# EAGLE board Joystickv13 (EAGLE 7.2.0)
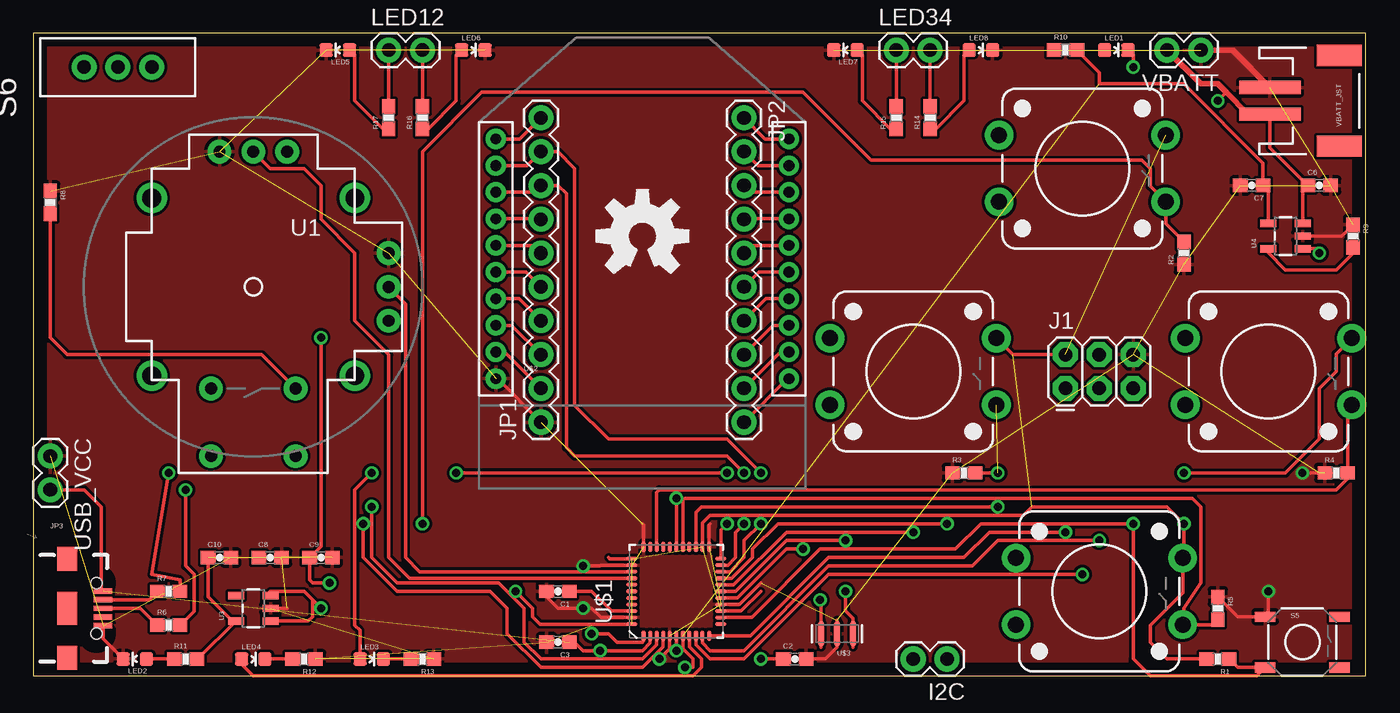
[diagram p0: board, top side]
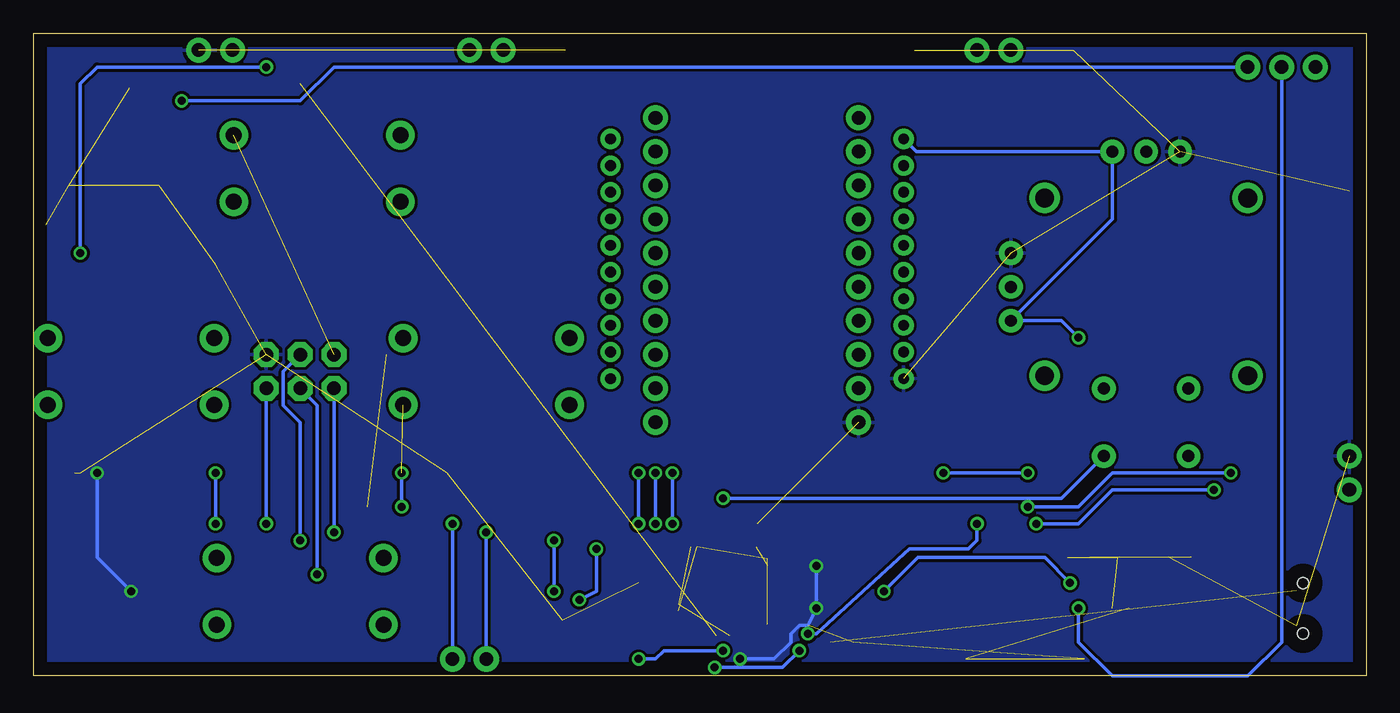
[diagram p1: board, bottom side, seen from below]

Size 100 x 48.25 mm. Coordinates in mm from the lower left corner, seen from the top.
Outline: 0,0 100,0 100,48.25 0,48.25 0,0
Copper layers (1*16): Top 0.035mm / dielectric 1.5mm / Bottom 0.035mm
Design rules "default": minimum track width 10mil, minimum drill 0.6mm, track to track 8mil, track to pad 8mil, pad to pad 8mil, via to via 8mil, smd to smd 8mil, copper to edge 40mil, drill to drill 8mil, minimum pad ring 10mil, minimum via ring 8mil, stop-mask expansion 4mil, vias tented up to drill 0mil, thermal gap 10mil

## Footprints (pad centres in the part's own frame; a part is rotated, then mirrored left to right if it is on the bottom)
0603-CAP = smd 1.1 x 1: 1 -0.85,0; 2 0.85,0
1X02 = drill 1.016 pad 1.88: 1 0,0; 2 2.54,0
2X3 = drill 1.016 pad 1.88 octagon: 1 0,0; 2 0,2.54; 3 2.54,0; 4 2.54,2.54; 5 5.08,0; 6 5.08,2.54
1X10 = drill 1.016 pad 1.88: 1 0,0; 2 2.54,0; 3 5.08,0; 4 7.62,0; 5 10.16,0; 6 12.7,0; 7 15.24,0; 8 17.78,0; 9 20.32,0; 10 22.86,0
USB-B-MICRO-SMD_V03 = smd 1.4 x 0.4: D+1 2.7,0; D-1 2.7,0.65; GND1 2.7,-1.3; ID1 2.7,-0.65; VBUS1 2.7,1.3 | smd 1.5 x 1.8: SHIELD1 0,3.7; SHIELD2 0,-3.7 | smd 1.5 x 2.5: SHIELD3 0,0 | hole 0.85: 2.2,1.9; 2.2,-1.9
LED-0603 = smd 1 x 1: A 0,-0.877; C 0,0.877
0603-RES = smd 1.1 x 1: 1 -0.85,0; 2 0.85,0
TACTILE-PTH-12MM = drill 1.2 pad 2.159: 1 6.25,-2.5; 2 -6.25,-2.5; 3 6.25,2.5; 4 -6.25,2.5
TACTILE-SWITCH-SMD = smd 1.524 x 0.762: 1 -2.794,1.905; 2 2.794,1.905; 3 -2.794,-1.905; 4 2.794,-1.905
SWITCH-SPDT = drill 1.016 pad 1.88: 1 0,2.54; 2 0,0; 3 0,-2.54
JOYSTICK = drill 0.9 pad 1.778: B1A -3.175,12.7; B1B 3.175,12.7; B2A -3.175,7.62; B2B 3.175,7.62 | drill 0.889 pad 1.778: H1 -2.54,-10.16; H2 0,-10.16; H3 2.54,-10.16; V1 -10.16,2.54; V2 -10.16,0; V3 -10.16,-2.54 | drill 1.397 pad 2.286: MOUNT1 -7.62,6.668; MOUNT2 -7.62,-6.668; MOUNT3 7.62,-6.668; MOUNT4 7.62,6.668
SOT23-5 = smd 0.55 x 1.2: 1 -0.95,-1.3; 2 0,-1.3; 3 0.95,-1.3; 4 0.95,1.3; 5 -0.95,1.3
QFN-44-NOPAD_1:1-LESS_PASTE = smd 0.8 x 0.3: 1 -3.337,2.458; 2 -3.337,1.958; 3 -3.337,1.479; 4 -3.337,0.979; 5 -3.337,0.5; 6 -3.337,0; 7 -3.337,-0.5; 8 -3.337,-0.979; 9 -3.337,-1.479; 10 -3.337,-1.958; 11 -3.337,-2.458; 23 3.337,-2.458; 24 3.337,-1.958; 25 3.337,-1.479; 26 3.337,-0.979; 27 3.337,-0.5; 28 3.337,0; 29 3.337,0.5; 30 3.337,0.979; 31 3.337,1.479; 32 3.337,1.958; 33 3.337,2.458 | smd 0.3 x 0.8: 12 -2.458,-3.337; 13 -1.958,-3.337; 14 -1.479,-3.337; 15 -0.979,-3.337; 16 -0.5,-3.337; 17 0,-3.337; 18 0.5,-3.337; 19 0.979,-3.337; 20 1.479,-3.337; 21 1.958,-3.337; 22 2.458,-3.337; 34 2.458,3.337; 35 1.958,3.337; 36 1.479,3.337; 37 0.979,3.337; 38 0.5,3.337; 39 0,3.337; 40 -0.5,3.337; 41 -0.979,3.337; 42 -1.479,3.337; 43 -1.958,3.337; 44 -2.458,3.337
XBEE-1 = drill 0.8 pad 1.524: 1 -11,20; 2 -11,18; 3 -11,16; 4 -11,14; 5 -11,12; 6 -11,10; 7 -11,8; 8 -11,6; 9 -11,4; 10 -11,2; 11 11,2; 12 11,4; 13 11,6; 14 11,8; 15 11,10; 16 11,12; 17 11,14; 18 11,16; 19 11,18; 20 11,20
RESONATOR-SMD = smd 0.45 x 1.905: 1 -1.2,0; 2 0,0; 3 1.2,0
JST-2-SMD = smd 1 x 4.6: 1 -1,-3.7; 2 1,-3.7 | smd 1.6 x 3.4: NC1 -3.4,1.5; NC2 3.4,1.5

## Placement (x,y rotation side)
C1  0.1uF  [0603-CAP]  39.37,6.35 180 top
C2  1.0uF  [0603-CAP]  57.15,1.27 0 top
C3  1.0uF  [0603-CAP]  39.37,2.54 180 top
C6  10uF  [0603-CAP]  96.52,36.83 0 top
C7  4.7uF  [0603-CAP]  91.44,36.83 180 top
C8  10uF  [0603-CAP]  17.78,8.89 0 top
C9  1.0uF  [0603-CAP]  21.59,8.89 0 top
C10  0.1uF  [0603-CAP]  13.97,8.89 0 top
I2C  [1X02]  68.58,1.27 180 top
J1  AVR_SPI_PRG_6PTH  [2X3]  77.47,21.59 0 top
JP1  M10"  [1X10]  38.1,19.05 90 top
JP2  M10"  [1X10]  53.34,41.91 270 top
JP3  USB_MICROB_PLUGCONN-11752  [USB-B-MICRO-SMD_V03]  2.54,5.08 0 top
LED1  Yellow  [LED-0603]  81.28,46.99 270 top
LED2  RED  [LED-0603]  7.62,1.27 90 top
LED3  GREEN  [LED-0603]  25.4,1.27 270 top
LED4  GREEN  [LED-0603]  16.51,1.27 270 top
LED5  GREEN  [LED-0603]  22.86,46.99 90 top
LED6  [LED-0603]  33.02,46.99 270 top
LED7  RED  [LED-0603]  60.96,46.99 90 top
LED8  BLUE  [LED-0603]  71.12,46.99 270 top
LED12  [1X02]  26.67,46.99 0 top
LED34  [1X02]  64.77,46.99 0 top
LOGO1  OSHW-LOGOL  [OSHW-LOGO-L]  45.72,33.02 0 top
R1  10K  [0603-RES]  88.9,1.27 180 top
R2  10K  [0603-RES]  86.36,31.75 90 top
R3  10K  [0603-RES]  69.85,15.24 0 top
R4  10K  [0603-RES]  97.79,15.24 0 top
R5  10K  [0603-RES]  88.9,5.08 270 top
R6  22  [0603-RES]  10.16,3.81 0 top
R7  22  [0603-RES]  10.16,6.35 0 top
R8  10K  [0603-RES]  1.27,35.56 270 top
R9  2.0k  [0603-RES]  99.06,33.02 270 top
R10  470  [0603-RES]  77.47,46.99 0 top
R11  470  [0603-RES]  11.43,1.27 0 top
R12  330  [0603-RES]  20.32,1.27 180 top
R13  330  [0603-RES]  29.21,1.27 180 top
R14  330  [0603-RES]  67.31,41.91 90 top
R15  330  [0603-RES]  64.77,41.91 90 top
R16  330  [0603-RES]  29.21,41.91 90 top
R17  330  [0603-RES]  26.67,41.91 90 top
S1  SWITCH-MOMENTARY-212MM  [TACTILE-PTH-12MM]  78.74,38.1 0 top
S2  SWITCH-MOMENTARY-212MM  [TACTILE-PTH-12MM]  66.04,22.86 0 top
S3  SWITCH-MOMENTARY-212MM  [TACTILE-PTH-12MM]  92.71,22.86 0 top
S4  SWITCH-MOMENTARY-212MM  [TACTILE-PTH-12MM]  80.01,6.35 0 top
S5  Reset  [TACTILE-SWITCH-SMD]  95.25,2.54 0 top
S6  [SWITCH-SPDT]  6.35,45.72 90 top
U1  JOYSTICKPTH  [JOYSTICK]  16.51,29.21 180 top
U3  V_REG_MIC5219SMD  [SOT23-5]  16.51,5.08 90 top
U4  MCP73831  [SOT23-5]  93.98,33.02 90 top
U$1  ATMEGA32U41:1-LESS_PASTE  [QFN-44-NOPAD_1:1-LESS_PASTE]  48.26,6.35 90 top
U$2  XBEE-1B1  [XBEE-1]  45.72,20.32 0 top
U$3  8MHZ  [RESONATOR-SMD]  60.33,3.17 180 top
USB_VCC  [1X02]  1.27,16.51 270 top
VBATT  [1X02]  87.63,46.99 180 top
VBATT_JST  [JST-2-SMD]  96.52,43.18 270 top

## Library data of the parts
C1 C10 = SparkFun-Capacitors; PROD_ID: CAP-00810
C2 C3 C9 = SparkFun-Capacitors; PROD_ID: CAP-00868
C6 C8 = SparkFun-Capacitors; PROD_ID: CAP-11015
C7 = SparkFun-Capacitors; PROD_ID: CAP-08280
I2C J1 JP1 JP2 LED12 LED34 USB_VCC VBATT VBATT_JST = SparkFun-Connectors
JP3 = SparkFun-Connectors; PROD_ID: CONN-11752
LED1 LED4 LED6 = SparkFun-LED; PROD_ID: DIO-09003
LED2 LED7 = SparkFun-LED; PROD_ID: DIO-00819
LED3 LED5 = SparkFun-LED; PROD_ID: DIO-00821
LED8 = SparkFun-LED; PROD_ID: DIO-08575
LOGO1 = SparkFun-Aesthetics
R1-R5 R8 = SparkFun-Resistors; PROD_ID: RES-00824
R6 R7 = SparkFun-Resistors; PROD_ID: RES-08698
R9 = SparkFun-Resistors; PROD_ID: RES-08296
R10 R11 = SparkFun-Resistors; PROD_ID: RES-07869
R12-R17 = SparkFun-Resistors; PROD_ID: RES-00818
S1-S4 = SparkFun-Electromechanical; PROD_ID: SWCH-09185
S5 = SparkFun-Electromechanical; PROD_ID: SWCH-08247
S6 = SparkFun-Electromechanical; PROD_ID: SWCH-08261
U1 = SparkFun-Electromechanical
U3 = SparkFun-PowerIC
U4 = SparkFun-PowerIC; PROD_ID: IC-09995
U$1 = SparkFun-DigitalIC
U$2 = SparkFun-RF
U$3 = SparkFun-FreqCtrl; PROD_ID: XTAL-08895

## Nets
3.3V: C8.1 C9.1 C10.1 J1.2 JP1.10 R1.2 R11.2 S1.3 S2.3 S3.3 S4.3 U1.H1 U1.V1 U3.5 U$1.14 U$1.24 U$1.34 U$1.44 U$2.1
A0: U1.V2 U$1.36
A1: U1.H2 U$1.37
D2: I2C.1 U$1.19
D3: I2C.2 U$1.18
D4: R3.2 S2.1 U$1.25
D5: R4.2 S3.1 U$1.31
D6: R5.2 S4.1 U$1.27
D7: R2.2 S1.1 U$1.1
D8: U1.B1A U$1.28
D9: U$1.29
D10: U$1.30
D+: R6.2 U$1.4
D-: R7.2 U$1.3
GND: C1.2 C2.2 C3.2 C6.2 C7.2 C8.2 C9.2 C10.2 J1.6 JP1.1 JP3.GND1 LED2.C LED5.C LED6.C LED7.C LED8.C R2.1 R3.1 R4.1 R5.1 R8.1 R9.1 R12.1 R13.1 S5.1 U1.H3 U1.V3 U3.2 U4.2 U$1.5 U$1.15 U$1.23 U$1.33 U$1.35 U$1.43 U$2.10 U$3.2 USB_VCC.1 VBATT.1 VBATT_JST.1
MISO: J1.1 U$1.11
MOSI: J1.4 U$1.10
N$1: U$1.17 U$3.1
N$2: C1.1 U$1.42
N$3: JP3.D+1 R6.1
N$4: JP1.2 U$2.9
N$5: C2.1 U$1.6
N$6: U$1.16 U$3.3
N$8: JP1.3 U$2.8
N$9: JP3.D-1 R7.1
N$10: JP1.4 U$2.7
N$11: R9.2 U4.5
N$12: JP1.5 U$2.6
N$13: JP1.6 U$2.5
N$14: JP1.7 U$2.4
N$15: JP2.10 U$2.11
N$16: JP2.9 U$2.12
N$17: JP2.8 U$2.13
N$18: JP2.7 U$2.14
N$19: JP2.6 U$2.15
N$20: JP2.5 U$2.16
N$21: JP2.4 U$2.17
N$22: R8.2 U1.B2A
N$23: JP2.3 U$2.18
N$24: JP2.2 U$2.19
N$25: JP2.1 U$2.20
N$26: LED2.A R11.1
N$27: LED1.A R10.1
N$28: LED1.C U4.1
N$29: LED4.A U$1.8
N$30: LED4.C R12.2
N$31: LED3.C R13.2
N$32: LED3.A U$1.22
N$33: LED12.1 R17.2
N$34: LED8.A R14.1
N$35: LED7.A R15.1
N$36: LED6.A R16.1
N$37: LED5.A R17.1
N$38: LED12.2 R16.2
N$39: LED34.1 R15.2
N$40: LED34.2 R14.2
RESET: J1.5 R1.1 S5.3 U$1.13
RX: JP1.9 U$1.20 U$2.2
SCK: J1.3 U$1.9
TX: JP1.8 U$1.21 U$2.3
USB_VCC: C3.1 C7.1 JP3.VBUS1 R10.2 U4.4 U$1.2 U$1.7 USB_VCC.2
VBATT: C6.1 S6.3 U4.3 VBATT.2 VBATT_JST.2
VIN: S6.2 U3.1 U3.3

## Tracks (layer width: path | path; a pad name or v marks a point on that pad's centre or on a via)
3.3V  (via drill 0.6)  (7 unrouted)
  Top 0.254: U$1.24 50.22,11.48 50.8,12.06 74.3,12.06 74.93,12.7 85.09,12.7 v86.36,11.43 86.36,8.89 86.3,8.89 S4.3 86.26,6.25 83.82,3.81 83.82,2.54 85.09,1.27 R1.2 | U$1.34 43.26,8.81 43.18,8.89 | U$1.14 53.13,4.87 54.61,6.35 | U$1.44 38.02,3.89 37.47,4.45 37.47,5.08 v36.2,6.35 | v22.23,6.99 20.95,6.99 20.74,7.2 C9.1 21.59,9.74 v21.59,25.4 | J1.2 73.52,24.13 S2.3 | v86.36,15.24 93.98,15.24 96.52,17.78 96.52,21.59 97.79,22.86 97.79,24.19 S3.3 | R11.2 12.35,1.27 U3.5 14.92,4.13 13.12,5.93 C10.1 | U$2.1 36.51,40.32 JP1.10
  Bottom 0.254: v36.2,6.35 33.66,8.89 24.13,8.89 v22.23,6.99 | v86.36,11.43 v86.36,15.24 | U$2.1 33.77,39.37 U1.H1 19.05,34.29 U1.V1 22.86,26.67 v21.59,25.4
A0
  Top 0.254: U$1.36 29,7.83 27.94,8.89 27.94,27.94 U1.V2
A1
  Top 0.254: U$1.37 28.23,7.33 26.67,8.89 26.67,24.13 24.13,26.67 24.13,31.75 21.59,34.29 21.59,36.83 20.32,38.1 17.78,38.1 U1.H2
D2  (via drill 0.6)
  Top 0.254: U$1.19 52.41,7.33 53.98,8.89 53.98,9.53 55.88,11.43 v68.58,11.43
  Bottom 0.254: v68.58,11.43 I2C.1
D3  (via drill 0.6)
  Top 0.254: U$1.18 52.57,6.85 56.52,10.79 v66.04,10.79
  Bottom 0.254: v66.04,10.79 I2C.2
D4  (via drill 0.6)  (1 unrouted)
  Top 0.254: U$1.25 49.74,12.27 50.16,12.7 v72.39,12.7 | v72.39,15.24 R3.2
  Bottom 0.254: v72.39,12.7 v72.39,15.24
D5
  Top 0.254: U$1.31 46.78,13.76 46.99,13.97 97.79,13.97 98.64,14.82 R4.2 98.64,20.04 S3.1
D6
  Top 0.254: U$1.27 48.76,13.2 48.9,13.34 87,13.34 87.63,12.7 87.63,6.99 86.36,5.08 86.36,3.95 S4.1 88.52,3.85 R5.2
D7  (via drill 0.6)
  Top 0.254: U$1.1 45.8,2.62 45.72,2.54 43.81,2.54 43.18,3.17 v41.91,3.17 | v29.21,11.43 29.21,39.37 33.66,43.81 57.78,43.81 62.87,38.73 83.19,38.73 83.82,38.1 83.82,36.77 S1.1 84.99,33.97 R2.2
  Bottom 0.254: v41.91,3.17 41.27,3.17 34.29,9.53 29.84,9.53 29.21,10.16 v29.21,11.43
D8  (via drill 0.6)
  Top 0.254: U$1.28 v48.26,13.34
  Bottom 0.254: v48.26,13.34 22.86,13.34 U1.B1A
D+  (via drill 0.6)
  Top 0.254: U$1.4 47.28,2.2 45.72,0.64 38.1,0.64 35.56,3.17 35.56,5.08 34.29,6.35 27.3,6.35 24.77,8.89 v24.77,11.43 | v11.43,13.97 11.43,8.26 12.06,7.62 12.06,4.87 R6.2
  Bottom 0.254: v24.77,11.43 21.59,11.43 19.05,13.97 v11.43,13.97
D-  (via drill 0.6)
  Top 0.254: U$1.3 46.78,2.33 45.72,1.27 38.1,1.27 36.83,2.54 36.83,5.08 34.92,6.99 27.3,6.99 25.4,8.89 v25.4,12.7 | v10.16,15.24 8.89,7.62 11.01,7.2 R7.2
  Bottom 0.254: v25.4,12.7 21.59,12.7 19.05,15.24 v10.16,15.24
GND  (via drill 0.6)  (30 unrouted)
  Top 0.254: U$1.33 45.8,11.35 45.72,11.43 | U$1.23 50.72,11.35 50.8,11.43 | U$1.35 42.6,8.31 42.55,8.26 v41.27,8.26 | U$1.43 42.6,4.39 41.91,5.08 v41.27,5.08 39.37,5.08 38.52,5.93 C1.2 | U$1.15 53,5.37 54.61,6.99 | U$1.5 47.76,2.04 v46.99,1.27 | C2.2 59.44,1.27 60.33,2.16 | R4.1 v95.25,15.24 | v92.71,6.35 92.71,4.7 S5.1 90.39,4.45 R5.1 | JP3.GND1 5.24,2.77 LED2.C | U$2.10 34.83,22.32 JP1.1 | U4.2 98.21,33.02 R9.1 | U3.2 19.05,5.08
  Top 0.406: VBATT.1 90.01,46.99 VBATT_JST.1
  Bottom 0.254: v46.99,1.27 44.45,1.27 43.18,2.54 43.18,3.17 42.55,3.81 41.91,3.81 v41.27,5.08 v41.27,8.26 | v95.25,15.24 95.25,8.89 v92.71,6.35
  pour Top: 0,0 100.33,0 100.33,48.26 0,48.26
  pour Bottom: 0,0 100.33,0 100.33,48.26 0,48.26
MISO  (via drill 0.6)
  Top 0.254: U$1.11 53.81,3.01 59.69,8.89 69.85,8.89 71.75,10.79 v77.47,10.79
  Bottom 0.254: v77.47,10.79 J1.1
MOSI  (via drill 0.6)
  Top 0.254: U$1.10 50.22,2.49 50.8,1.91 53.34,1.91 59.69,8.26 70.48,8.26 72.39,10.16 v80.01,10.16
  Bottom 0.254: v80.01,10.16 80.01,19.05 81.28,20.32 81.28,22.86 J1.4
N$1  (via drill 0.6)
  Top 0.254: U$1.17 52.7,6.35 56.52,10.16 v60.96,10.16 | v60.96,6.35 60.96,4.9 61.52,4.33 61.52,4.19
  Bottom 0.254: v60.96,10.16 v60.96,6.35
N$2
  Top 0.254: U$1.42 43.39,4.87 41.91,6.35 C1.1
N$3
  Top 0.254: JP3.D+1 8.04,5.08 R6.1
N$4
  Top 0.254: U$2.9 35.37,24.32 JP1.2
N$5  (via drill 0.6)
  Top 0.254: U$1.6 v48.26,1.91 | v54.61,1.27 C2.1
  Bottom 0.254: v48.26,1.91 52.7,1.91 53.34,1.27 v54.61,1.27
N$6  (via drill 0.6)
  Top 0.254: U$1.16 52.84,5.85 56.52,9.53 v57.78,9.53 | 59.12,4.19 59.12,5.64 v59.05,5.71
  Bottom 0.254: v57.78,9.53 57.78,6.35 v59.05,5.71
N$8
  Top 0.254: U$2.8 35.91,26.32 JP1.3
N$9
  Top 0.254: JP3.D-1 8.69,5.73 R7.1
N$10
  Top 0.254: U$2.7 36.45,28.32 JP1.4
N$11
  Top 0.254: R9.2 99.06,31.75 97.79,30.48 93.98,30.48 92.68,31.78 U4.5
N$12
  Top 0.254: U$2.6 36.99,30.32 JP1.5
N$13
  Top 0.254: U$2.5 37.53,32.32 JP1.6
N$14
  Top 0.254: U$2.4 38.07,34.32 JP1.7
N$15
  Top 0.254: U$2.11 56.61,22.32 JP2.10
N$16
  Top 0.254: U$2.12 56.07,24.32 JP2.9
N$17
  Top 0.254: U$2.13 55.53,26.32 JP2.8
N$18
  Top 0.254: U$2.14 54.99,28.32 JP2.7
N$19
  Top 0.254: U$2.15 54.45,30.32 JP2.6
N$20
  Top 0.254: U$2.16 53.91,32.32 JP2.5
N$21
  Top 0.254: U$2.17 53.37,34.32 JP2.4
N$22
  Top 0.254: R8.2 1.27,25.4 2.54,24.13 17.14,24.13 U1.B2A
N$23
  Top 0.254: U$2.18 53.85,36.32 JP2.3
N$24
  Top 0.254: U$2.19 54.39,38.32 JP2.2
N$25
  Top 0.254: U$2.20 54.93,40.32 JP2.1
N$26
  Top 0.254: LED2.A R11.1
N$27  (1 unrouted)
N$28  (via drill 0.6)
  Top 0.254: U4.1 96.2,32.07 v96.52,31.75 | v82.55,45.72 82.55,46.6 LED1.C
  Bottom 0.254: v96.52,31.75 96.52,44.45 95.25,45.72 v82.55,45.72
N$29
  Top 0.254: U$1.8 49.24,2.2 50.16,1.27 50.16,0.64 49.53,0 16.51,0 15.63,0.88 LED4.A
N$30
  Top 0.254: LED4.C R12.2
N$31
  Top 0.254: R13.2 LED3.C
N$32  (via drill 0.6)
  Top 0.254: U$1.22 51.6,10.96 v52.07,11.43 | v52.07,15.24 v31.75,15.24 | v25.4,15.24 24.13,13.97 24.13,3.81 24.52,3.42 LED3.A
  Bottom 0.254: v52.07,11.43 v52.07,15.24 | v31.75,15.24 v25.4,15.24
N$33
  Top 0.254: R17.2 LED12.1
N$34
  Top 0.254: R14.1 67.73,41.06 69.85,43.18 69.85,46.6 LED8.A
N$35
  Top 0.254: R15.1 64.35,41.06 62.23,43.18 62.23,46.6 LED7.A
N$36
  Top 0.254: R16.1 29.63,41.06 31.75,43.18 31.75,46.6 LED6.A
N$37
  Top 0.254: R17.1 26.25,41.06 24.13,43.18 24.13,46.6 LED5.A
N$38
  Top 0.254: R16.2 LED12.2
N$39
  Top 0.254: R15.2 LED34.1
N$40
  Top 0.254: R14.2 LED34.2
RESET  (via drill 0.6)
  Top 0.254: U$1.13 53.92,4.39 59.05,9.53 69.22,9.53 71.12,11.43 v82.55,11.43 82.55,1.27 83.82,0 91.82,0 S5.3 90.39,0.64 R1.1
  Bottom 0.254: v82.55,11.43 J1.5
RX  (via drill 0.6)
  Top 0.254: U$1.20 52.28,7.83 53.34,8.89 53.34,10.16 v54.61,11.43 | v54.61,15.24 52.07,17.78 43.18,17.78 40.64,20.32 40.64,38.1 39.37,39.37 JP1.9 37.05,38.32 U$2.2
  Bottom 0.254: v54.61,11.43 v54.61,15.24
SCK  (via drill 0.6)
  Top 0.254: U$1.9 49.74,2.33 50.8,1.27 53.34,1.27 59.69,7.62 v78.74,7.62
  Bottom 0.254: v78.74,7.62 78.74,20.32 J1.3
TX  (via drill 0.6)
  Top 0.254: U$1.21 52.12,8.31 52.7,8.89 52.7,10.79 v53.34,11.43 | v53.34,15.24 52.07,16.51 40.64,16.51 40.01,17.14 40.01,36.2 39.37,36.83 JP1.8 37.59,36.32 U$2.3
  Bottom 0.254: v53.34,11.43 v53.34,15.24
USB_VCC  (via drill 0.6)  (2 unrouted)
  Top 0.254: U$1.2 46.3,2.49 45.72,1.91 v42.55,1.91 41.27,1.91 40.64,2.54 C3.1 | U$1.7 48.76,2.04 49.53,1.27 49.53,0.64 v48.9,0.64 | USB_VCC.2 3.81,13.97 5.08,12.7 5.08,6.54 JP3.VBUS1 | U4.4 92.68,36.44 C7.1 92.29,38.52 86.36,44.45 80.01,44.45 80.01,45.3 R10.2
  Bottom 0.254: v48.9,0.64 43.81,0.64 v42.55,1.91
VBATT  (via drill 0.6)
  Top 0.254: U4.3 95.28,36.44 C6.1 92.82,39.68 VBATT_JST.2 | v88.9,43.18 89.53,43.81
  Top 0.406: VBATT_JST.2 91.17,42.18 89.53,43.81 88.9,44.45 87.63,44.45 VBATT.2
  Bottom 0.254: S6.3 77.47,45.72 80.01,43.18 v88.9,43.18
VIN  (via drill 0.6)
  Top 0.254: U3.3 17.81,6.32 17.78,6.35 20.32,6.35 20.95,5.71 | 20.95,5.71 20.95,4.45 20.64,4.13 U3.1 | 20.95,5.71 v21.59,5.08
  Bottom 0.254: v21.59,5.08 21.59,2.54 19.05,0 8.89,0 6.35,2.54 S6.2